# Altium PCB adapter.PcbDoc
Units mm, origin at the board's own origin, x right, y up, seen from the top; angles counter-clockwise.
Board outline 33.02 x 27.94 mm, 2 copper layers (Top Layer, Bottom Layer); 10 components, 21 nets, 60 pads, 0 vias.
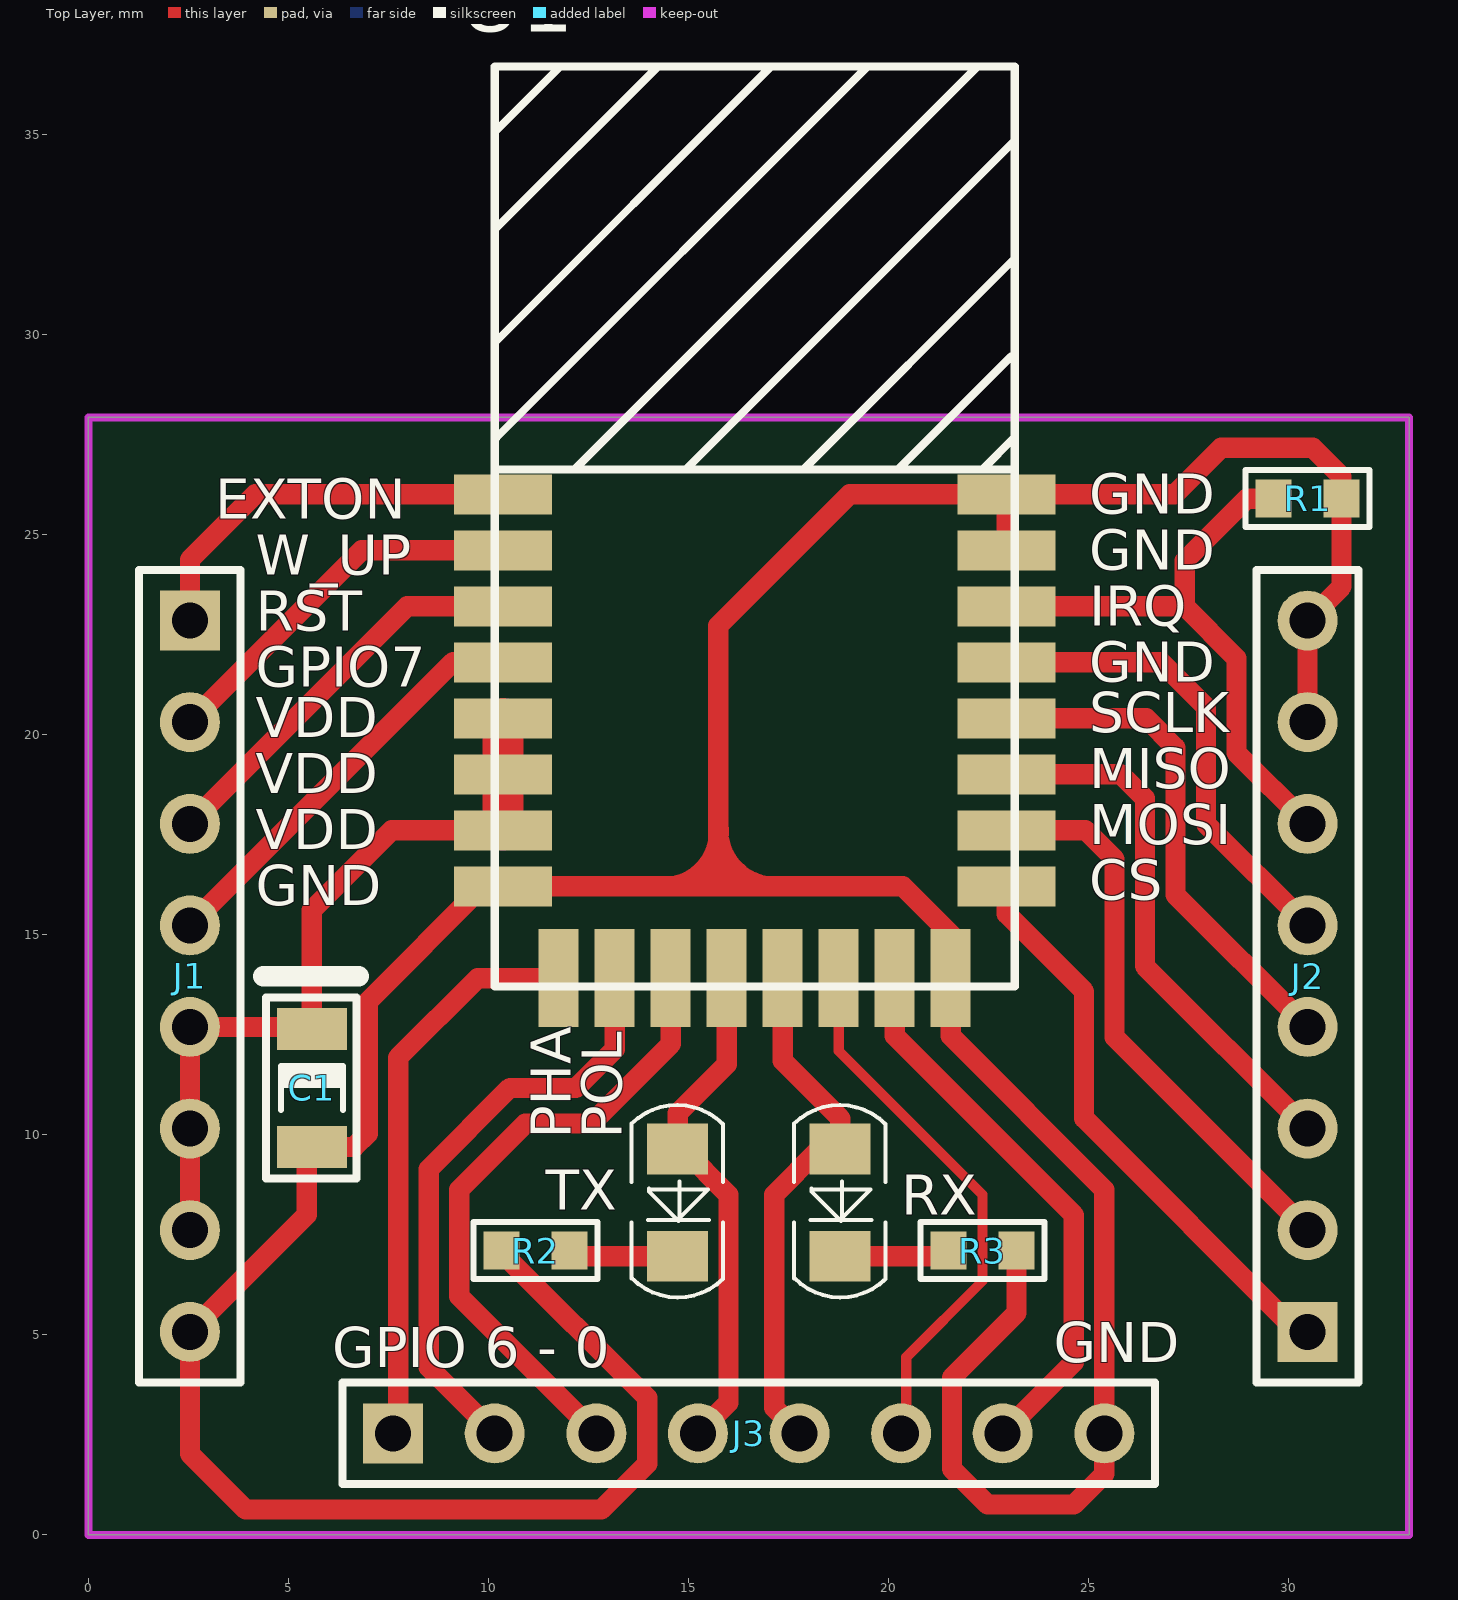
[diagram p0: Top Layer view]
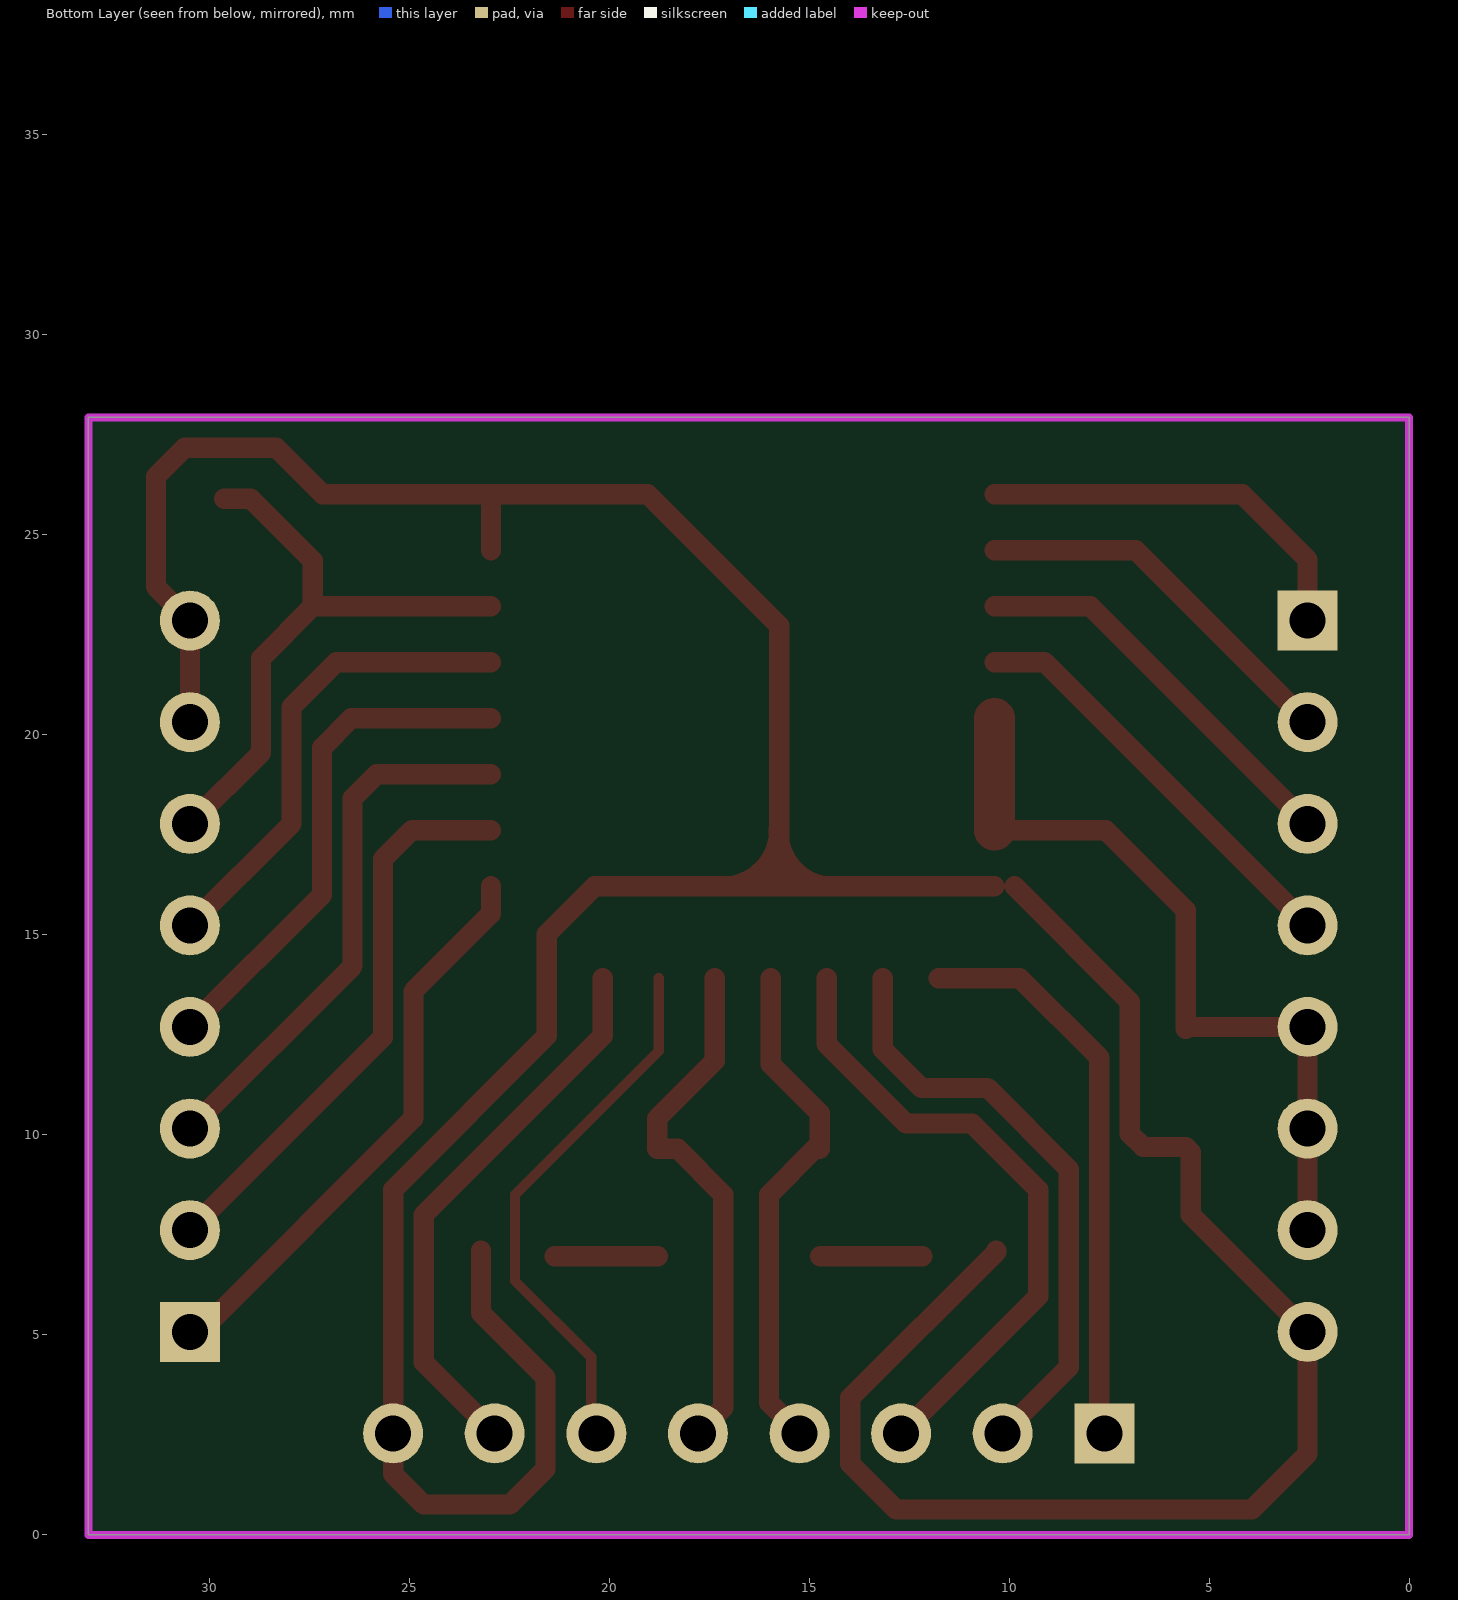
[diagram p1: Bottom Layer view, seen from below]

## Layer stack, top to bottom
Top Layer: signal copper 0.0356
Dielectric: dielectric 0.32, FR-4, Dk 4.8
Bottom Layer: signal copper 0.0356

## Board outline
3.302,27.94 0,27.94 0,0 33.02,0 33.02,27.94 0,27.94

## Design rules (kind name [scope] priority, off if disabled: settings)
Clearance [All] p1: gap=0.254
ComponentClearance [All] p1: gap=0.254 collisioncheckmode=3 verticalgap=0.254
PolygonConnect [All] p1: connectstyle=Relief reliefconductorwidth=0.254 reliefentries=4 polygonreliefangle="90 Angle"
RoutingVias [All] p1: holewidth=0.711 width=1.27 viastyle="Through Hole" minholewidth=0.711 minwidth=1.27 maxholewidth=0.711 maxwidth=1.27
SolderMaskExpansion [All] p1: expansion=0.102
TestPointUsage [All] p1: valid=0 allowmultiple=FALSE
Testpoint [All] p1: side=15 testpointundercomponent=TRUE minsize=1.016 maxsize=2.54 preferedsize=1.524 minholesize=0 maxholesize=1.016 preferedholesize=0.813 testpointgrid=0.025 style=1023 order=0-112345678
Width [All] p1: maxlimit=1.016 minlimit=0.254 preferedwidth=0.254
18 further rules are at their usual default settings.

## Components (designator, comment, footprint, x,y, rotation, side; value= is the part's Value field where it differs from the comment)
C1 "10uF/1206" C1206 5.588,11.176 r270 top
J1 "CON8" HDR1X8 2.54,22.86 r270 top
J2 "CON8" HDR1X8 30.48,5.08 r90 top
J3 "CON8" HDR1X8 7.62,2.54 r0 top
R1 "10K" R0603 30.48,25.908 r180 top
R2 "470" R0603 11.176,7.112 r0 top
R3 "470" R0603 22.352,7.112 r180 top
RX "LED" LED0805 18.796,9.652 r270 top (schematic designator D2)
TX "LED" LED0805 14.732,9.652 r270 top (schematic designator D1)
U1 "DWM1000" DWM1000_MODULE 10.16,13.716 r0 top

## Footprints (in the part's own frame and the unit in brackets; to place one, negate y for a bottom-side part, rotate by r counter-clockwise, add the part's x,y. Pads: shape width x height; smd on the part's side, far side on the other; paste and mask are expansions set on the pad)
C1206 [mm] "Chip Capacitor, 2-Leads, Body 3.1x1.6mm, IPC Medium Density"
  rect 1.05x1.75 smd: 1(-1.475,0) 2(1.475,0)
  silkscreen extent -2.79,-1.22 2.26,1.17, body extent -1.6,-0.85 1.6,0.85, height 0.55
DWM1000_MODULE [mm]
  rect 2.45x1 smd: 1(0.205,12.3) 2(0.205,10.9) 3(0.205,9.5) 4(0.205,8.1) 5(0.205,6.7) 6(0.205,5.3) 7(0.205,3.9) 8(0.205,2.5) 17(12.795,2.5) 18(12.795,3.9) 19(12.795,5.3) 20(12.795,6.7) 21(12.795,8.1) 22(12.795,9.5) 23(12.795,10.9) 24(12.795,12.3)
  rect 1x2.45 smd: 9(1.6,0.205) 10(3,0.205) 11(4.4,0.205) 12(5.8,0.205) 13(7.2,0.205) 14(8.6,0.205) 15(10,0.205) 16(11.4,0.205)
  silkscreen extent 0,0 13,23
HDR1X8 [mm] "Connector; Header; 8 Position"
  rect 1.5x1.5 hole 0.9: 1(0,0)
  round 1.5 hole 0.9: 2(2.54,0) 3(5.08,0) 4(7.62,0) 5(10.16,0) 6(12.7,0) 7(15.24,0) 8(17.78,0)
  silkscreen extent -1.27,-1.27 19.05,1.27
LED0805 [mil]
  rect 50x60 smd: 1(0,0) 2(105.71,-0.32)
  silkscreen extent -43,-45 146,45
R0603 [mm] "Chip Resistor, 2-Leads, Body 1.6x0.8mm, IPC Medium Density"
  rect 0.9x0.95 smd: 1(-0.85,0) 2(0.85,0)
  silkscreen extent -1.55,-0.71 1.55,0.71, body extent -0.85,-0.45 0.85,0.45, height 0.45

## Part data
C1: library part CAP, "Capacitor"
R1 R2 R3: library part RES
U1: library part DWM1000_MODULE

## Nets (pads, with @x,y where several pads share a name; then routed paths per layer and width w, separated by ;. In a path a pad name is that pad's centre, name@x,y a point inside that pad or via, vN(x,y) a via of type N, cw(c..) or ccw(c..) an arc to the next point about the centre after c; other vN are vias at no path point)
GND: C1.2 J1.8 J2.7 J2.8 J3.8 R1.1 R2.1 R3.1 U1.8 U1.16 U1.23 U1.24 | length 113.2
  Top Layer w0.508: U1.8@9.866,16.216 6.985,13.335 6.985,10.033 6.653,9.701 C1.2 5.461,9.574 5.461,8.001 J1.8 2.54,2.032 3.937,0.635 12.827,0.635 13.97,1.778 13.97,3.429 10.326,7.073 R2.1 ; U1.8 20.36,16.216 21.56,15.016 21.56,12.476 25.4,8.636 25.4,1.524 24.638,0.762 22.479,0.762 21.59,1.651 21.59,3.937 23.202,5.549 R3.1 ; 15.748,16.216 15.748,22.733 19.031,26.016 27.159,26.016 28.321,27.178 30.607,27.178 31.33,26.455 31.33,23.71 J2.8 J2.7 ; 17.018,16.216 cw(c17.165,17.633) 15.748,17.78 ; U1.23 U1.24 ; 15.748,17.78 cw(c14.395,17.57) 14.605,16.216 ccw(c14.395,17.57) 15.748,17.78
NetD1_2: R2.2 TX.2 | length 2.6
  Top Layer w0.508: R2.2@12.174,6.967 TX.2
NetD2_2: R3.2 RX.2 | length 2.6
  Top Layer w0.508: RX.2 R3.2@21.357,6.967
NetJ1_1: J1.1 U1.1 | length 10
  Top Layer w0.508: J1.1 2.54,24.384 4.172,26.016 U1.1
NetJ1_2: J1.2 U1.2 | length 9.6
  Top Layer w0.508: J1.2 6.836,24.616 U1.2
NetJ1_3: J1.3 U1.3 | length 10.1
  Top Layer w0.508: J1.3 7.976,23.216 U1.3
NetJ1_4: J1.4 U1.4 | length 10.5
  Top Layer w0.508: J1.4 9.116,21.816 U1.4
NetJ2_1: J2.1 U1.17 | length 14.4
  Top Layer w0.508: U1.17 22.955,15.526 24.892,13.589 24.892,10.414 30.226,5.08 J2.1
NetJ2_2: J2.2 U1.18 | length 14.3
  Top Layer w0.508: U1.18 24.929,17.616 25.654,16.891 25.654,12.446 J2.2
NetJ2_3: J2.3 U1.19 | length 13.6
  Top Layer w0.508: U1.19 25.815,19.016 26.416,18.415 26.416,14.224 J2.3
NetJ2_4: J2.4 U1.20 | length 12.9
  Top Layer w0.508: U1.20 26.447,20.416 27.178,19.685 27.178,16.002 J2.4
NetJ2_5: J2.5 U1.21 | length 12
  Top Layer w0.508: U1.21 26.825,21.816 27.94,20.701 27.94,17.78 J2.5
NetJ2_6: J2.6 R1.2 U1.22 | length 15.2
  Top Layer w0.508: U1.22 27.407,23.216 ; R1.2 28.956,25.908 27.407,24.359 27.407,23.216 ; J2.6 28.702,19.558 28.702,21.921 27.407,23.216
NetJ3_1: J3.1 U1.9 | length 14.3
  Top Layer w0.508: J3.1 7.747,2.667 7.747,11.938 9.73,13.921 U1.9
NetJ3_2: J3.2 U1.10 | length 15
  Top Layer w0.508: J3.2 8.509,4.191 8.509,9.144 10.541,11.176 12.192,11.176 13.16,12.144 U1.10
NetJ3_3: J3.3 U1.11 | length 16
  Top Layer w0.508: J3.3 9.271,5.969 9.271,8.636 10.922,10.287 12.573,10.287 14.56,12.274 U1.11
NetJ3_6: J3.6 U1.14 | length 13.7
  Top Layer w0.254: U1.14 18.76,12.101 22.352,8.509 22.352,6.35 20.447,4.445 20.447,2.667 J3.6
NetJ3_7: J3.7 U1.15 | length 14
  Top Layer w0.508: U1.15 20.16,12.479 24.638,8.001 24.638,4.318 J3.7
RX_LED: J3.5 RX.1 U1.13 | length 13.2
  Top Layer w0.508: U1.13 17.36,11.85 18.796,10.414 RX.1 18.288,9.652 17.145,8.509 17.145,3.175 J3.5
TX_LED: J3.4 TX.1 U1.12 | length 12.8
  Top Layer w0.508: J3.4 16.002,3.302 16.002,8.509 14.859,9.652 TX.1 14.732,10.541 15.96,11.769 U1.12
VCC: C1.1 J1.5 J1.6 J1.7 U1.5 U1.6 U1.7 | length 19.5
  Top Layer w0.508: J1.7 J1.5 5.539,12.7 C1.1 5.588,15.621 7.583,17.616 U1.7
  Top Layer w1.016: U1.7 U1.5

## Keep-outs
Keep-Out Layer:
  lines w0.203: 0,0 0,27.94 33.02,27.94 33.02,0 0,0

## Silkscreen, mask and mechanical layers (free items; w line width, h text height)
Top Overlay:
  text "GND" at 25.019,25.527 h1
  text "EXTON" at 3.175,25.4 h1
  text "GND" at 25.019,24.13 h1
  text "W_UP" at 4.191,24.003 h1
  text "IRQ" at 25.019,22.733 h1
  text "RST" at 4.191,22.606 h1
  text "GND" at 25.019,21.336 h1
  text "GPIO7" at 4.191,21.209 h1
  text "SCLK" at 25.019,20.066 h1
  text "VDD" at 4.191,19.939 h1
  text "MISO" at 25.019,18.669 h1
  text "VDD" at 4.191,18.542 h1
  text "MOSI" at 25.019,17.272 h1
  text "VDD" at 4.191,17.145 h1
  text "CS" at 25.019,15.875 h1
  text "GND" at 4.191,15.748 h1
  text "PHA" at 12.065,9.906 h1 r90
  text "POL" at 13.335,9.906 h1 r90
  text "GND" at 24.13,4.318 h1
  text "GPIO 6 - 0" at 6.096,4.191 h1